# Altium PCB system.PcbDoc
Units mil, origin at the board's own origin, x right, y up, seen from the top; angles counter-clockwise.
Board outline 2545 x 3820 mil, 2 copper layers (Top Layer, Bottom Layer); 43 components, 40 nets, 160 pads, 14 vias.
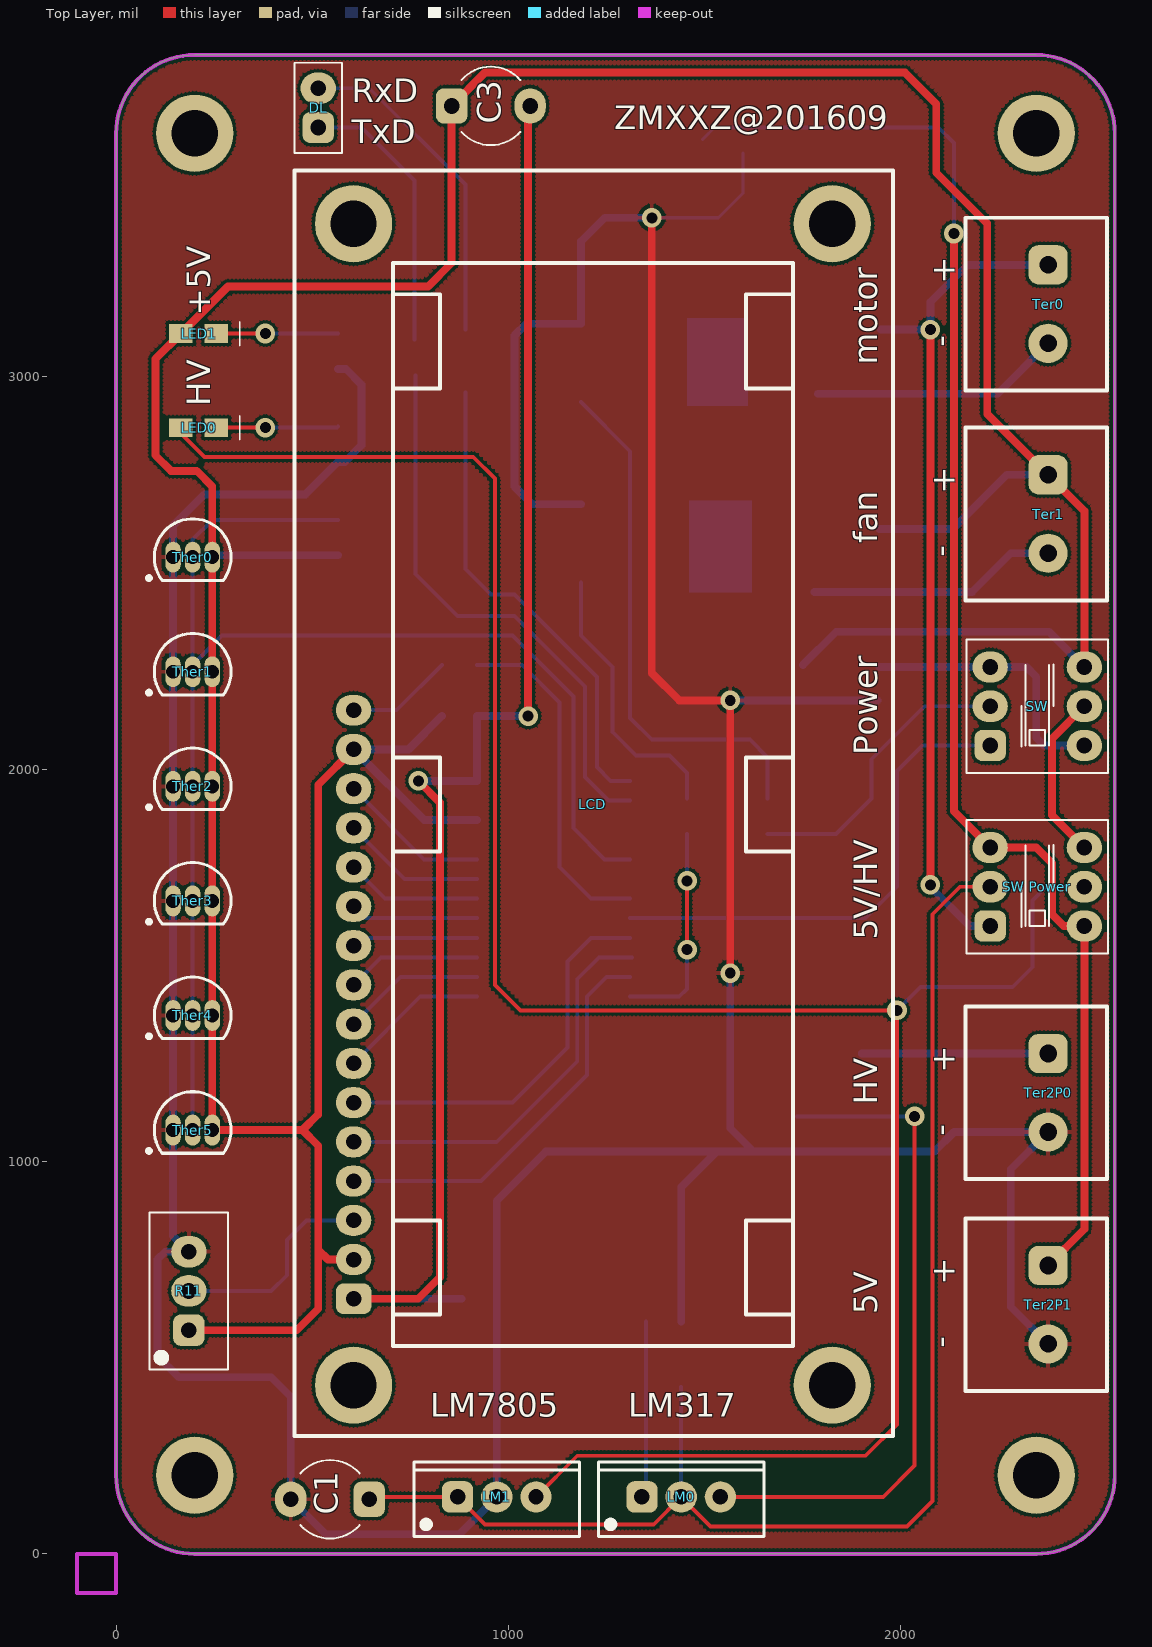
[diagram p0: Top Layer view]
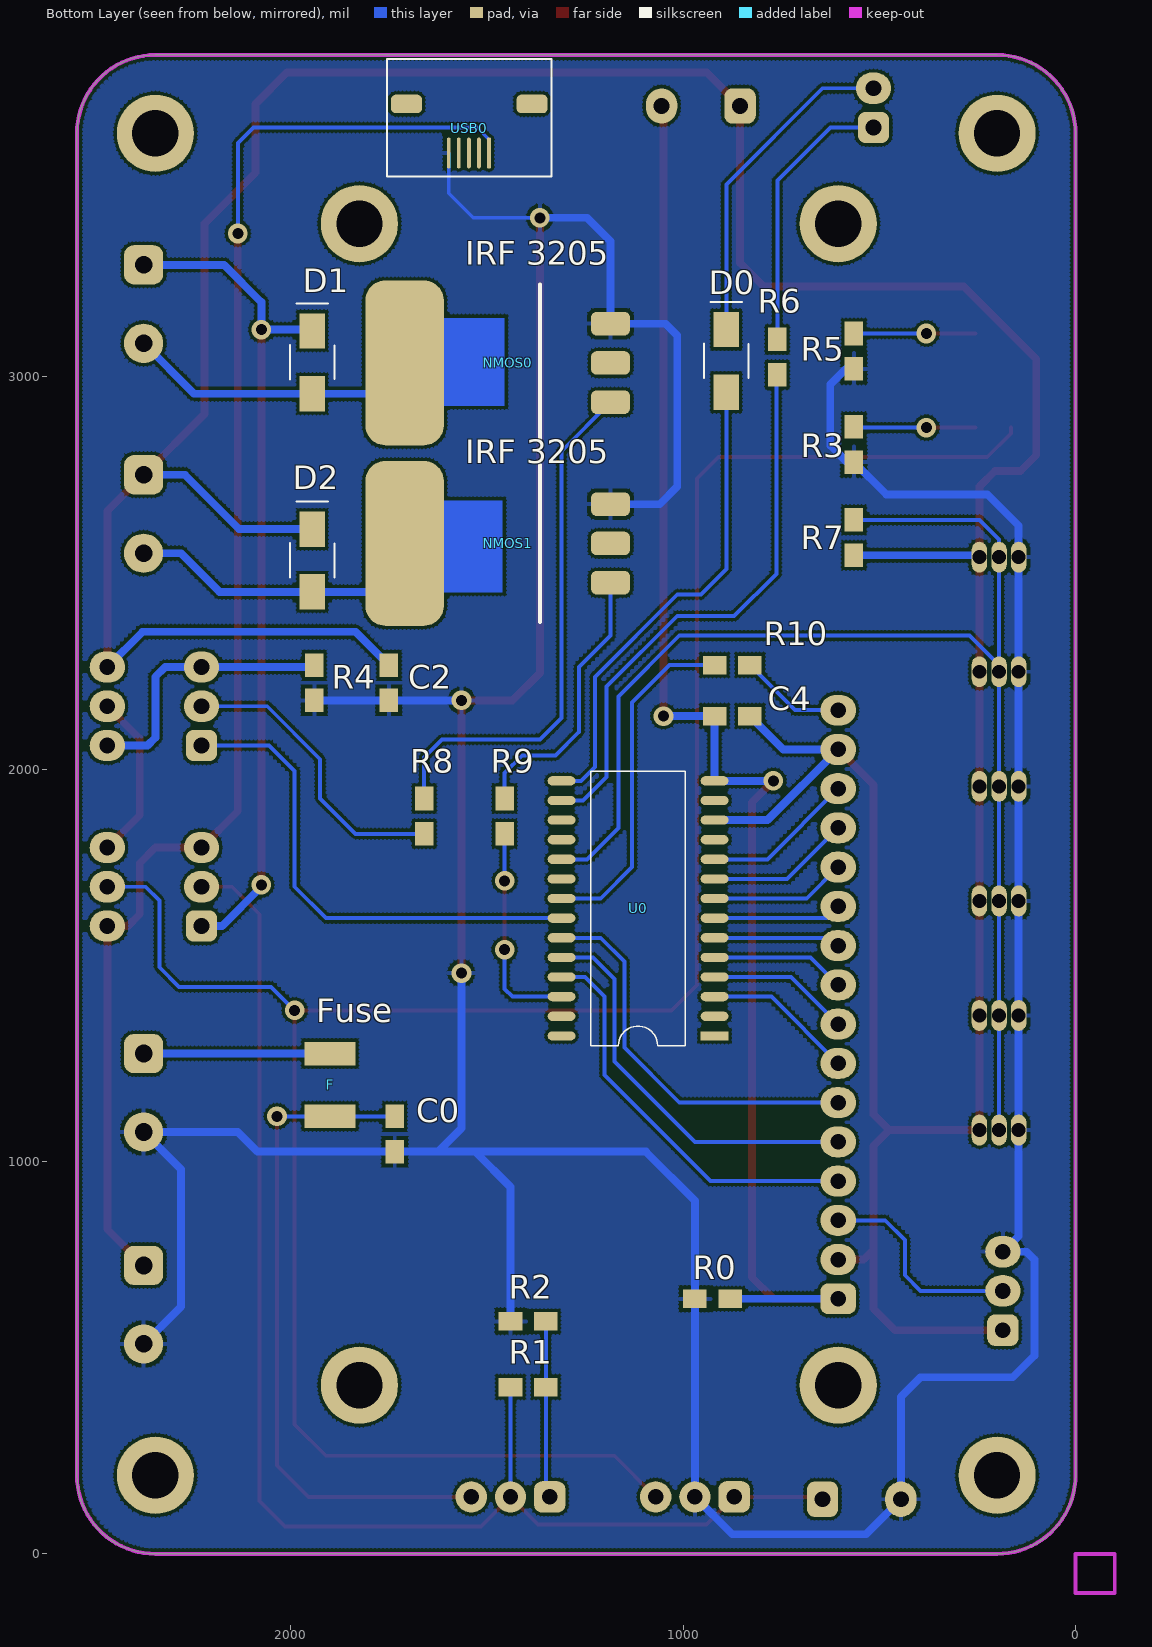
[diagram p1: Bottom Layer view, seen from below]

## Layer stack, top to bottom
Top Solder: solder mask 0.4, Solder Resist, Dk 3.5
Top Layer: signal copper 1.4
Dielectric 1: dielectric 12.6, FR-4, Dk 4.8
Bottom Layer: signal copper 1.4
Bottom Solder: solder mask 0.4, Solder Resist, Dk 3.5

## Board outline
0,200 0,3620 cw(c200,3620) 200,3820 2345,3820 cw(c2345,3620) 2545,3620 2545,200 cw(c2345,200) 2345,0 200,0 cw(c200,200)

## Design rules (kind name [scope] priority, off if disabled: settings)
Clearance [All] p1: gap=8
HoleSize [All] p1: absolutevalues=TRUE maxlimit=120 minlimit=1 maxpercent=80.000 minpercent=20.000
MinimumSolderMaskSliver [All] p1: minsoldermaskwidth=2
PolygonConnect [All] p1: connectstyle=Relief reliefconductorwidth=10 reliefentries=4 polygonreliefangle="90 Angle" airgapwidth=10
RoutingVias [All] p1: holewidth=25 width=40 viastyle="Through Hole" minholewidth=28 minwidth=50 maxholewidth=28 maxwidth=50
SMDNeckDown [All] p1: percent=90.000
SilkToSilkClearance [All] p1: silktosilkclearance=5
SilkToSolderMaskClearance [IsPad] p1: minsilkscreentomaskgap=5 clearancetoexposedcopper=TRUE
SolderMaskExpansion [All] p1: expansion=4
Width VCC [InNet('VCC')] p1: maxlimit=25 minlimit=8 preferedwidth=20
Width SGND [InNet('SGND')] p2: maxlimit=25 minlimit=8 preferedwidth=20
Width AGND [InNet('AGND')] p3: maxlimit=25 minlimit=8 preferedwidth=20
Width +5 [InNet('+5')] p4: maxlimit=25 minlimit=8 preferedwidth=20
Width [All] p5: maxlimit=25 minlimit=8 preferedwidth=10
26 further rules are at their usual default settings.

## Classes and differential pairs
component class U_lcd: LCD R10 R11
component class U_mcu: C3 C4 D0 DL R6 U0
component class U_motor: D1 D2 NMOS0 NMOS1 R8 R9 Ter0 Ter1
component class U_power: C0 C1 C2 F LED0 LED1 LM0 LM1 R0 R1 R2 R3 R4 R5 SW "SW Power" Ter2P0 Ter2P1 USB0
component class U_sensors: R7 Ther0 Ther1 Ther2 Ther3 Ther4 Ther5
net class LB[0..7]: LB0 LB1 LB2 LB3 LB4 LB5 LB6 LB7

## Components (designator, comment, footprint, x,y, rotation, side; value= is the part's Value field where it differs from the comment)
C0 "Cap2" 0805(M) 1735,1025 r90 bottom
C1 "Cap1" 25V47uF(DIP) 645,139.09 r180 top
C2 "Cap2" 0805(M) 1750,2175 r90 bottom
C3 "Cap1" 25V47uF(DIP) 855,3690 r0 top
C4 "Cap2" 0805(M) 920,2135 r180 bottom
D0 "1N5819" SMA(M) 890,3040 r90 bottom
D1 "1N4007" SMA(M) 1945,3036.56 r90 bottom
D2 "1N4007" SMA(M) 1945,2531.56 r90 bottom
DL "2Pin" 2Pin(DIP) 515,3635 r90 top
F "Fuse" 1812(M) 1900,1205 r90 bottom
LCD "1602" 1602(DIP) 605,650 r90 top locked
LED0 "LED" 0805_(M) 165,2870 r0 top
LED1 "LED" 0805_(M) 165,3110 r0 top
LM0 "LM317" TO220(DIP) 1440,145 r0 top
LM1 "LM7805" TO220(DIP) 970,145 r0 top
NMOS0 "IRF3205" TO-263-3(M) 1185,2935 r90 bottom
NMOS1 "IRF3205" TO-263-3(M) 1185,2475 r90 bottom
R0 "Res" 0805(M) 880,650 r0 bottom
R1 "Res" 0805(M) 1350,425 r0 bottom
R2 "Res" 0805(M) 1350,592.5 r0 bottom
R3 "Res" 0805(M) 565,2872.5 r270 bottom
R4 "Res" 0805(M) 1940,2265 r270 bottom
R5 "Res" 0805(M) 565,3110 r270 bottom
R6 "Res" 0805(M) 760,3005 r90 bottom
R7 "Res" 0805(M) 565,2635 r270 bottom
R8 "Res" 0805(M) 1660,1835 r90 bottom
R9 "Res" 0805(M) 1455,1835 r90 bottom
R10 "Res" 0805(M) 920,2265 r180 bottom
R11 "Rpot" 3296W(DIP) 185.24,570 r90 top
SW "Power" AFT-03(DIP) 2227.5,2060 r270 top
"SW Power" "5V/HV" AFT-03(DIP) 2227.5,1600 r270 top
Ter0 "motor" KF301-2P(DIP) 2375,3285 r270 top
Ter1 "fan" KF301-2P(DIP) 2375,2750 r270 top
Ter2P0 "HV" KF301-2P(DIP) 2375,1275 r270 top
Ter2P1 "5V" KF301-2P(DIP) 2375,735 r270 top
Ther0 "18b20" TO-92A(DIP) 195,2540 r270 top
Ther1 "18b20" TO-92A(DIP) 195,2248 r270 top
Ther2 "18b20" TO-92A(DIP) 195,1956 r270 top
Ther3 "18b20" TO-92A(DIP) 195,1664 r270 top
Ther4 "18b20" TO-92A(DIP) 195,1372 r270 top
Ther5 "18b20" TO-92A(DIP) 195,1080 r270 top
U0 "STC15W401AS_SOP28_TSSOP28_SKDIP28" SOP28 930,1320 r0 bottom
USB0 "MicroUSB_B-" MicroUSB_B-(M) 1495,3570 r0 bottom

## Footprints (in the part's own frame and the unit in brackets; to place one, negate y for a bottom-side part, rotate by r counter-clockwise, add the part's x,y. Pads: shape width x height; smd on the part's side, far side on the other; paste and mask are expansions set on the pad)
2Pin(DIP) [mil] "杜邦线"
  rrect50% 80x80 hole 40: 1(0,0)
  oval 80x90 hole 40: 2(100,0)
  silkscreen extent -65,-60 165,60
25V47uF(DIP) [mil] "电解电容"
  rrect50% 80x90 hole 40: 1(0,0)
  oval 80x90 hole 40: 2(200,0)
  silkscreen extent 25,-100 175,100
0805(M) [mil] "0805(无极性)"
  rect 60x47.24 smd: 1(0,0) 2(90,0)
0805_(M) [mil] "0805(极性)"
  rect 60x47.24 smd: 1(0,0) 2(90,0)
  silkscreen extent 150,-30 150,30
1602(DIP) [mm] "lcd1602"
  round 5 hole 3: 0(-5.588,0) 0(-5.588,-30.988) 0(69.596,-30.988) 0(69.596,0)
  rrect50% 2x2.3 hole 1: 1(0,0)
  oval 2x2.3 hole 1: 2(2.54,0) 3(5.08,0) 4(7.62,0) 5(10.16,0) 6(12.7,0) 7(15.24,0) 8(17.78,0) 9(20.32,0) 10(22.86,0) 11(25.4,0) 12(27.94,0) 13(30.48,0) 14(33.02,0) 15(35.56,0) 16(38.1,0)
  silkscreen extent -8.89,-34.92 73.02,3.81
1812(M) [mil] "fuse"
  rect 60x130 smd: 1(-90,0) 2(70,0)
3296W(DIP) [mil] "电位计"
  rrect50% 80x80 hole 40: 1(0,0)
  oval 80x90 hole 40: 2(100,0) 3(200,0)
  silkscreen extent -100,-100 300,100
AFT-03(DIP) [mil] "DPDT"
  rrect50% 80x80 hole 40: 1(0,0)
  oval 80x90 hole 40: 2(-100,0) 3(-200,0) 4(-200,240) 5(-100,240) 6(0,240)
  silkscreen extent -270,-60 70,300
KF301-2P(DIP) [mil] "2Pin接头"
  rrect50% 100x100 hole 45: 1(0,0)
  round 100 hole 45: 2(200,0)
  silkscreen extent -120,-210 320,150
MicroUSB_B-(M) [mm] "ĸͷ"
  rrect50% 2x1.2 smd: 0(-2.794,-3.175) 0(5.334,-3.175)
  rrect50% 0.25x2 smd: 1(0,0)
  oval 0.25x2 smd: 2(0.65,0) 3(1.3,0) 4(1.95,0) 5(2.6,0)
  silkscreen extent -4.06,-6.1 6.6,1.52
SMA(M) [mil] "SMA(DO-214AC)"
  rect 90x65 smd: 1(-80,0) 2(80,0)
  silkscreen extent -44,-57 150,57
SOP28 [mm]
  rect 1.8x0.6 smd: 1(-0.254,0)
  oval 1.8x0.6 smd: 2(-0.254,-1.27) 3(-0.254,-2.54) 4(-0.254,-3.81) 5(-0.254,-5.08) 6(-0.254,-6.35) 7(-0.254,-7.62) 8(-0.254,-8.89) 9(-0.254,-10.16) 10(-0.254,-11.43) 11(-0.254,-12.7) 12(-0.254,-13.97) 13(-0.254,-15.24) 14(-0.254,-16.51) 15(9.652,-16.51) 16(9.652,-15.24) 17(9.652,-13.97) 18(9.652,-12.7) 19(9.652,-11.43) 20(9.652,-10.16) 21(9.652,-8.89) 22(9.652,-7.62) 23(9.652,-6.35) 24(9.652,-5.08) 25(9.652,-3.81) 26(9.652,-2.54) 27(9.652,-1.27) 28(9.652,0)
  silkscreen extent 1.63,-17.14 7.77,0.64
TO220(DIP) [mil] "TO220AB"
  rrect50% 80x80 hole 39.37: 1(-100,0)
  round 80 hole 39.37: 2(0,0) 3(100,0)
  silkscreen extent -211,-100 211,89
TO-92A(DIP) [mm] "TO, Flat Index; 3 In-Line, Axial Leads; Body Dia. 4.5mm; Leads 0.51 x 0.48 mm (max)"
  oval 2x1 hole 0.9: 1(0,-1.27) 2(0,0) 3(0,1.27)
  silkscreen extent -2.48,-2.95 1.5,2.48, body extent -2.48,-2.5 1.5,2.5, height 6.86
TO-263-3(M) [mil]
  rrect50% 60x100 smd: 1(0,0) 2(100,0) 3(200,0)
  rrect50% 420x200 smd: 2(100,525)
  silkscreen extent -100,180 300,180

## Part data
C0 C2 C4: "非极性电容"
C1 C3: "极性电容"
D0: library part Diode2, "肖特基二极管"
D1 D2: library part Diode1, "整流二极管"
F: "保险丝"
LCD: "lcd1602"
LM0: library part LM317*, "三端稳压(可调)"
LM1: library part LM7805*, "三端稳压"
NMOS0 NMOS1: library part MOSFET-N
R11: "电位计"
SW "SW Power": library part AFT-03(8*8), "双刀双掷(DPDT)"
Ter0 Ter1 Ter2P0 Ter2P1: library part KF301-2P, "接线端子 脚距5.08MM 300V/16A"
Ther0 Ther1 Ther2 Ther3 Ther4 Ther5: "DS18B20 Programmable Resolution 1-Wire? Digital Thermometer"
USB0: "ĸͷ"

## Free pads (board coordinates)
  round 196.85 hole 118.11: 0(200,200) 0(200,3620) 0(2345,200) 0(2345,3620)

## Via types
v1: diameter 50, hole 28, Top Layer to Bottom Layer, 14 vias

## Nets (pads, with @x,y where several pads share a name; then routed paths per layer and width w, separated by ;. In a path a pad name is that pad's centre, name@x,y a point inside that pad or via, vN(x,y) a via of type N, cw(c..) or ccw(c..) an arc to the next point about the centre after c; other vN are vias at no path point)
+5: C2.2 C3.1 C4.2 D2.2 LCD.2 LCD.15 LED1.1 R7.2 R11.1 SW.4 Ter1.1 Ther0.3 Ther1.3 Ther2.3 Ther3.3 Ther4.3 Ther5.3 U0.12 | length 10634.7
  Top Layer w20: R11.1 460,570 515,625 515,1040 475,1080 ; 515,775 540,750 LCD.2 ; LCD.15 515,1960 515,1120 475,1080 ; SW.4 2467.5,2657.5 Ter1.1 2220,2905 2220,3390 2090,3520 2090,3695 2010,3775 940,3775 C3.1 855,3290 795,3230 285,3230 LED1.1 100,3045 100,2800 140,2760 205,2760 245,2720 Ther0.3 Ther1.3 Ther2.3 Ther3.3 Ther4.3 Ther5.3 475,1080
  Bottom Layer w20: Ther0.3@250,2545 R7.2 ; C4.2 745,2050 LCD.15 785,1870 U0.12 ; C2.2 1835,2350 2377.5,2350 SW.4 ; D2.2 2131.56,2611.56 2270,2750 Ter1.1
AGND: C0.1 C1.2 C2.1 LM1.2 NMOS0.3 NMOS1.3 R0.2 R2.2 R3.2 R4.2 R5.2 R11.3 Ter2P0.2 Ter2P1.2 Ther0.1 Ther1.1 Ther2.1 Ther3.1 Ther4.1 Ther5.1 USB0.5 | length 12023.9
  Top Layer w20: v1(1365,3405) 1365,2245 1435,2175 v1(1565,2175) v1(1565,1480)
  Bottom Layer w8: v1(1365,3405) 1535,3405 1597.36,3467.36 USB0.5
  Bottom Layer w20: R5.2 585,3020 625,2980 625,2825 582.5,2782.5 R3.2 482.5,2700 225,2700 145,2620 Ther0.1 Ther1.1 Ther2.1 Ther3.1 Ther4.1 Ther5.1 145,810.24 R11.3 125,770 105,750 105,505 160,450 395,450 445,400 C1.2 534.09,50 875,50 LM1.2 R0.2 970,900 1095,1025 1530,1025 ; NMOS1.3 1060,2675 1015,2720 1015,3105 1045,3135 NMOS0.3 1185,3345 1245,3405 v1(1365,3405) ; R2.2 1440,935 1530,1025 ; v1(1565,1480) 1565,1085 1625,1025 ; v1@1575,2175 C2.1 R4.2 ; Ter2P1.2 2280,630 2280,980 Ter2P0.2 2135,1075 2085,1025 C0.1 1625,1025 ; 1530,1025 1625,1025
LB0: LCD.7 U0.3 | length 385.4
  Bottom Layer w10: LCD.7 775,1420 U0.3
LB1: LCD.8 U0.4 | length 364.7
  Bottom Layer w10: LCD.8 725,1470 U0.4
LB2: LCD.9 U0.5 | length 344
  Bottom Layer w10: LCD.9 675,1520 U0.5
LB3: LCD.10 U0.6 | length 323.3
  Bottom Layer w10: LCD.10 625,1570 U0.6
LB4: LCD.11 U0.7 | length 327.4
  Bottom Layer w10: LCD.11 635,1620 U0.7
LB5: LCD.12 U0.8 | length 348.1
  Bottom Layer w10: LCD.12 685,1670 U0.8
LB6: LCD.13 U0.9 | length 368.8
  Bottom Layer w10: LCD.13 735,1720 U0.9
LB7: LCD.14 U0.10 | length 389.6
  Bottom Layer w10: LCD.14 785,1770 U0.10
NetC0_2: C0.2 F.1 LM0.3 | length 1730.6
  Top Layer w10: LM0.3@1540,175 1570,145 1955,145 2035,225 v1(2035,1115)
  Bottom Layer w10: C0.2 F.1 v1(2035,1115)
NetC1_1: "SW Power.2" C1.1 LM0.2 LM1.1 R1.2 | length 3496.6
  Top Layer w10: C1.1@650.91,145 LM1.1 940,75 1370,75 LM0.2 1515,70 2015,70 2080,135 2080,1630 2150,1700 2227.5,1700
  Bottom Layer w10: LM0.2 R1.2
NetD0_1: D0.1 U0.15 | length 1228.4
  Bottom Layer w10: D0.1 890,2510 955,2445 1015,2445 1225,2235 1225,2005 1260,1970 U0.15
NetD0_2: D0.2 DL.2 | length 846.5
  Bottom Layer w10: DL.2 645,3735 890,3490 D0.2
NetD1_1: D1.1 NMOS0.2@1710,3035 Ter0.2 | length 639.8
  Bottom Layer w20: NMOS0.2@1788.44,2956.56 D1.1 2246.56,2956.56 Ter0.2
NetD2_1: D2.1 NMOS1.2@1710,2575 Ter1.2 | length 635.8
  Bottom Layer w20: NMOS1.2@1780,2451.56 D2.1 2181.56,2451.56 2280,2550 Ter1.2
NetDL_1: DL.1 R6.2 | length 705.9
  Bottom Layer w10: DL.1 625,3635 760,3500 R6.2
NetF_2: F.2 Ter2P0.1 | length 475
  Bottom Layer w20: F.2 Ter2P0.1
NetLCD_3: LCD.3 R11.2 | length 547
  Bottom Layer w10: R11.2 395,670 435,710 435,800 485,850 LCD.3
NetLCD_4: LCD.4 U0.25 | length 1037.5
  Bottom Layer w10: LCD.4 930,950 1200,1220 1200,1420 1250,1470 U0.25
NetLCD_5: LCD.5 U0.24 | length 1027.7
  Bottom Layer w10: LCD.5 970,1050 1175,1255 1175,1465 1230,1520 U0.24@1315,1520
NetLCD_6: LCD.6 U0.23 | length 1007.8
  Bottom Layer w10: LCD.6 1010,1150 1150,1290 1150,1510 1210,1570 U0.23
NetLCD_16: LCD.16 R10.2 | length 272.6
  Bottom Layer w10: LCD.16 715,2150 R10.2
NetLED0_1: "SW Power.5" LED0.1 LM1.3 | length 5963.7
  Top Layer w10: LED0.1 165,2855 225,2795 910,2795 965,2740 965,1450 1030,1385 v1(1990,1385) 1990,330 1910,250 1175,250 LM1.3
  Bottom Layer w10: v1(1990,1385) 2050,1445 2285,1445 2335,1495 2335,1665 2370,1700 2467.5,1700
NetLED0_2: LED0.2 R3.1 | length 311
  Top Layer w10: LED0.2 v1(380,2870)
  Bottom Layer w10: v1(380,2870) 562.5,2870 R3.1
NetLED1_2: LED1.2 R5.1 | length 310
  Top Layer w10: LED1.2 v1(380,3110)
  Bottom Layer w10: v1(380,3110) R5.1
NetLM0_1: LM0.1 R1.1 R2.1 | length 437.5
  Bottom Layer w10: LM0.1@1350,155 R1.1 R2.1
NetNMOS0_1: NMOS0.1 R8.2 | length 1353.2
  Bottom Layer w10: NMOS0.1 1310,2810 1310,2130 1365,2075 1615,2075 1660,2030 R8.2
NetNMOS1_1: NMOS1.1 R9.2 | length 711.6
  Bottom Layer w10: NMOS1.1 1185,2340 1265,2260 1265,2095 1325,2035 1410,2035 1455,1990 R9.2
NetR4_1: R4.1 SW.3 SW.6 | length 696.1
  Bottom Layer w20: R4.1@1945,2260 SW.3 2320,2260 2345,2235 2345,2080 2365,2060 SW.6
NetR6_1: R6.1 U0.16 | length 1426.4
  Bottom Layer w10: R6.1@762.5,3002.5 762.5,2497.5 870,2390 1015,2390 1195,2210 1195,1980 1255,1920 U0.16
NetR7_1: R7.1 Ther0.2 Ther1.2 Ther2.2 Ther3.2 Ther4.2 Ther5.2 U0.19 | length 3474.1
  Bottom Layer w10: Ther5.2 Ther4.2 Ther3.2 Ther2.2 Ther1.2 Ther1.2@195,2265 ; R7.1 245,2635 195,2585 Ther0.2 Ther1.2@195,2265 ; U0.19 1245,1770 1165,1850 1165,2185 1010,2340 270,2340 Ther1.2@195,2265
NetR8_1: R8.1 SW.2 | length 760.7
  Bottom Layer w10: R8.1 1835,1835 1925,1925 1925,2025 2060,2160 SW.2
NetR9_1: R9.1 U0.26 | length 548.3
  Top Layer w10: v1(1455,1540) v1(1455,1715)
  Bottom Layer w10: U0.26 1435,1420 1455,1440 v1(1455,1540) ; v1(1455,1715) R9.1
NetR10_1: R10.1 U0.21 | length 882.5
  Bottom Layer w10: R10.1 1035,2265 1130,2170 1130,1750 1210,1670 U0.21
"NetSW Power_3": "SW Power.3" "SW Power.6" Ter2P1.1 USB0.1 | length 3804.6
  Top Layer w20: v1(2135,3365) 2135,1892.5 2227.5,1800 2345,1800 2385,1760 2385,1630 2415,1600 2467.5,1600 2467.5,827.5 Ter2P1.1
  Bottom Layer w8: USB0.1@1495,3605 1525,3635
  Bottom Layer w10: 1525,3635 2095,3635 2135,3595 v1(2135,3365)
NetSW_1: SW.1 U0.22 | length 1272.6
  Bottom Layer w10: U0.22 1910,1620 1990,1700 1990,1995 2055,2060 SW.1
NetSW_5: "SW Power.4" SW.5 | length 428.3
  Top Layer w20: 2467.5,1800 2385,1882.5 2385,2077.5 SW.5
SGND: C3.2 C4.1 LCD.1 R0.1 U0.14 | length 3809.7
  Top Layer w20: LCD.1 770,650 825,705 825,1915 v1(770,1970) ; v1(1050,2135) 1050,3680 C3.2@1060,3690
  Bottom Layer w20: LCD.1 R0.1 ; v1(770,1970) U0.14 C4.1 v1(1050,2135)
VCC: "SW Power.1" D1.2 Ter0.1 | length 2134.8
  Top Layer w20: v1(2075,1705) v1@2075,3105
  Bottom Layer w20: D1.2@1948.44,3120 v1(2075,3120) 2075,3190 2170,3285 Ter0.1 ; v1(2075,1705) 2075,1700 2175,1600 2227.5,1600
pads on no net: LCD.0 NMOS0.2@1185,3035 NMOS1.2@1185,2575 U0.1 U0.2 U0.11 U0.13 U0.17 U0.18 U0.20 U0.27 U0.28 USB0.0 USB0.2 USB0.3 USB0.4

## Polygon pours and split planes (outlines as drawn)
AGND on Top Layer "Top Layer-No Net" (hatched 90Degree grid 10 track 10, remove dead copper, pour order 4): -30,3590 -30,3760 cw(c70,3760) 70,3860 2430,3860 2480,3860 cw(c2480,3760) 2580,3760 2580,160 2580,55 cw(c2480,55) 2480,-45 190,-45 70,-45 cw(c70,55) -30,55 -30,3585
AGND on Bottom Layer "Top Layer-No Net" (hatched 90Degree grid 10 track 10, remove dead copper, pour order 6): -30,3555 -30,3745 cw(c70,3745) 70,3845 2375,3845 2475,3845 cw(c2475,3745) 2575,3745 2575,265 2575,70 cw(c2475,70) 2475,-30 185,-30 65,-30 cw(c65,70) -35,70 -35,3550

## Keep-outs
Keep-Out Layer:
  lines w10: -100,-100 -100,0 0,0 0,-100 -100,-100 ; 0,200 ccw(c200,200) 200,0 2345,0 ccw(c2345,200) 2545,200 2545,3620 ccw(c2345,3620) 2345,3820 200,3820 ccw(c200,3620) 0,3620 0,200

## Other copper
Bottom Layer:
  rectangle net NetD2_1: 1460,2450 1620,2685
  rectangle net NetD1_1: 1455,2925 1610,3150

## Silkscreen, mask and mechanical layers (free items; w line width, h text height)
Top Overlay:
  text "RxD" at 600,3700 h60
  text "ZMXXZ@201609" at 1270,3630 h60
  text "TxD" at 600,3595 h60
  text "+5V" at 240,3155 h60 r90
  text "HV" at 240,2925 h60 r90
  text "LM7805" at 800.05,350 h60
  text "LM317" at 1305.04,350 h60
Bottom Overlay:
  text "IRF 3205" at 1555,3285 h60
  text "IRF 3205" at 1555,2780 h60
  text "Fuse" at 1935,1355 h60
Drill Drawing:
  text ".LEGEND" at 250,370 h60
  text "Drill Drawing." at 250,270 h60

## Text inside footprints (layer, text, board x,y; h text height)
Ter0: Top Overlay "+" at 2085,3305 h60 r270; Top Overlay "-" at 2085,3105 h60 r270
Ter1: Top Overlay "+" at 2085,2770 h60 r270; Top Overlay "-" at 2085,2570 h60 r270
Ter2P0: Top Overlay "+" at 2085,1295 h60 r270; Top Overlay "-" at 2085,1095 h60 r270
Ter2P1: Top Overlay "+" at 2085,755 h60 r270; Top Overlay "-" at 2085,555 h60 r270